# Altium PCB PCB_Project_TrafficLight.PcbDoc
Units mm, origin at the board's own origin, x right, y up, seen from the top; angles counter-clockwise.
Board outline 155.77 x 155.27 mm, 2 copper layers (Top Layer, Bottom Layer); 55 components, 146 nets, 516 pads, 0 vias.
Unrouted connection lines stored in the file: 247.
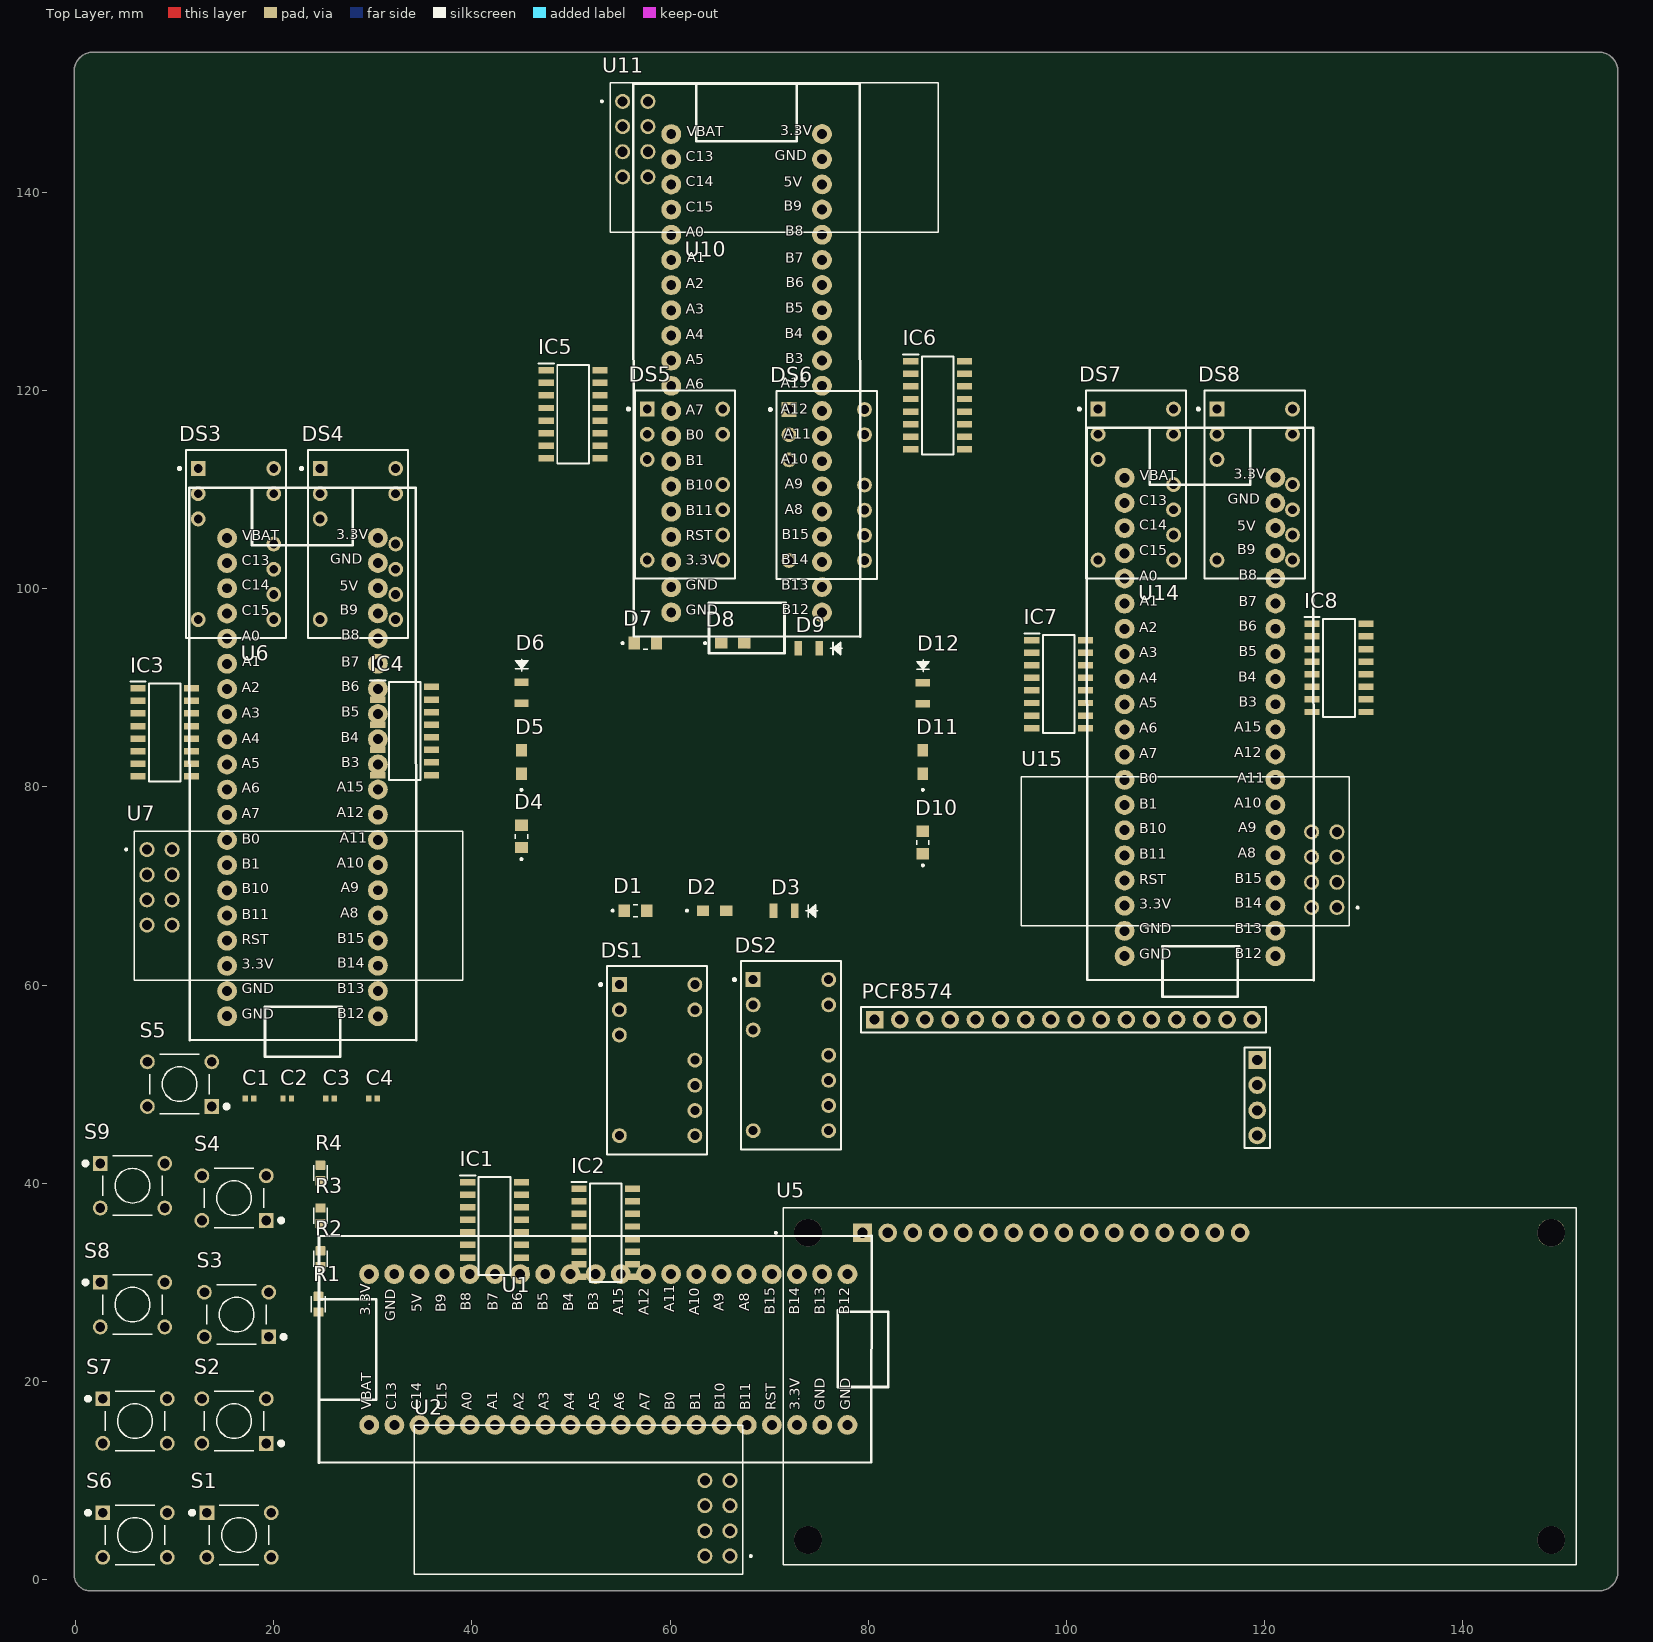
[diagram p0: Top Layer view]
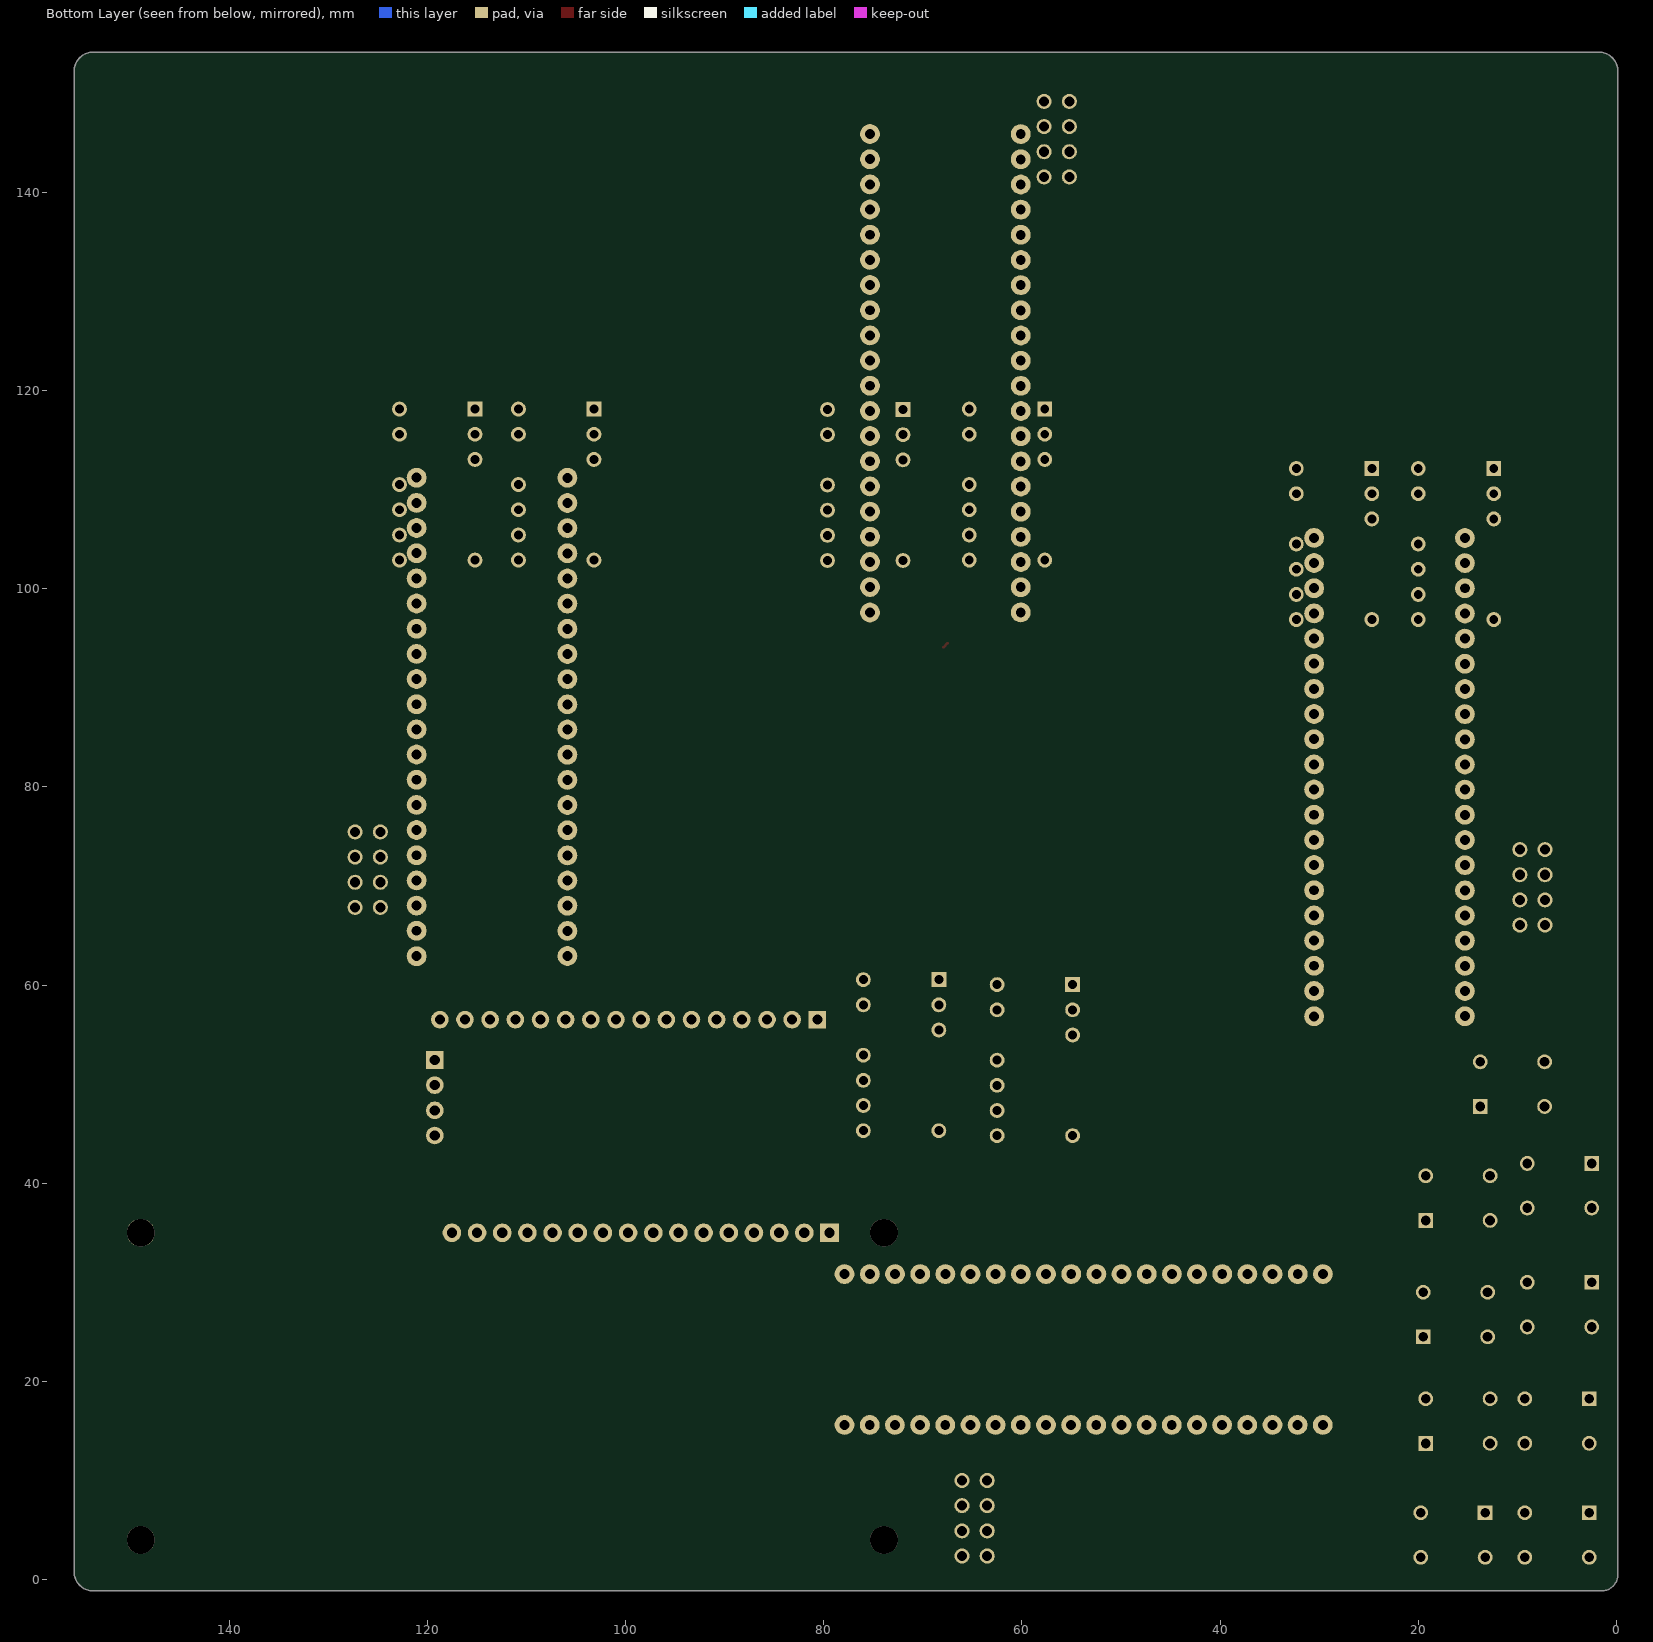
[diagram p1: Bottom Layer view, seen from below]

## Layer stack, top to bottom
Top Solder: solder mask 0.0102, Solder Resist, Dk 3.5
Top Layer: signal copper 0.0356
Dielectric 1: dielectric 0.32, FR-4, Dk 4.8
Bottom Layer: signal copper 0.0356
Bottom Solder: solder mask 0.0102, Solder Resist, Dk 3.5

## Board outline
0.344,-0.656 cw(c1.5,0.5) -0.135,0.5 -0.135,152.23 cw(c1.77,152.23) 1.77,154.135 153.73,154.135 cw(c153.73,152.23) 155.635,152.23 155.635,0.77 cw(c153.73,0.77) 153.73,-1.135 1.5,-1.135 cw(c1.5,0.5)

## Design rules (kind name [scope] priority, off if disabled: settings)
Clearance [All] p1: gap=0.254 ignorepadtopadclearanceinfootprint=FALSE
PolygonConnect [All] p1: connectstyle=Relief reliefconductorwidth=0.254 reliefentries=4 polygonreliefangle="90 Angle" airgapwidth=0.254
RoutingVias [All] p1: holewidth=0.711 width=1.27 viastyle="Through Hole" minholewidth=0.711 minwidth=1.27 maxholewidth=0.711 maxwidth=1.27
SolderMaskExpansion [All] p1: expansion=0.102 istentingtop=FALSE
SupplyNets "Schematic Supply Nets_2" [InNet('+5')] p1: voltage=0.000
SupplyNets "Schematic Supply Nets_1" [InNet('3.3VCC')] p2: voltage=0.000
SupplyNets "Schematic Supply Nets" [InNet('GND')] p3: voltage=0.000
Width [All] p1: maxlimit=0.5 minlimit=0.254 preferedwidth=0.3
30 further rules are at their usual default settings.

## Components (designator, comment, footprint, x,y, rotation, side; value= is the part's Value field where it differs from the comment)
C1 "10n" CAPC1005X55N 17.558,48.54 r0 top
C2 "10n" CAPC1005X55N 21.368,48.54 r0 top
C3 "10n" CAPC1005X55N 25.686,48.54 r0 top
C4 "10n" CAPC1005X55N 30.004,48.54 r0 top
D1 "7012X1" LED_7012X1 56.5,67.5 r0 top
D2 "APT2012YC" LED_APT2012YC 64.5,67.5 r0 top
D3 "CMD17-21VGD_TR8" LED_CMD17-21VGD_TR8 71.5,67.5 r180 top
D4 "7012X1" LED_7012X1 45,75 r90 top
D5 "APT2012YC" LED_APT2012YC 45,82.5 r90 top
D6 "CMD17-21VGD_TR8" LED_CMD17-21VGD_TR8 45,89.5 r270 top
D7 "7012X1" LED_7012X1 57.5,94.5 r0 top
D8 "APT2012YC" LED_APT2012YC 66.325,94.5 r0 top
D9 "CMD17-21VGD_TR8" LED_CMD17-21VGD_TR8 74,94 r180 top
D10 "7012X1" LED_7012X1 85.5,74.375 r90 top
D11 "APT2012YC" LED_APT2012YC 85.5,82.5 r90 top
D12 "CMD17-21VGD_TR8" LED_CMD17-21VGD_TR8 85.5,89.433 r270 top
DS1 "HDSP-311A" F-10(14) 58.69,52.42 r0 top
DS2 "HDSP-311A" F-10(14) 72.19,52.92 r0 top
DS3 "HDSP-311A" F-10(14) 16.19,104.5 r0 top
DS4 "HDSP-311A" F-10(14) 28.5,104.5 r0 top
DS5 "HDSP-311A" F-10(14) 61.5,110.5 r0 top
DS6 "HDSP-311A" F-10(14) 75.81,110.46 r0 top
DS7 "HDSP-311A" F-10(14) 107,110.5 r0 top
DS8 "HDSP-311A" F-10(14) 119,110.5 r0 top
IC1 "74HC595D" SOIC127P600X175-16N 42.288,35.675 r0 top
IC2 "74HC595D" SOIC127P600X175-16N 53.5,35 r0 top
IC3 "74HC595D" SOIC127P600X175-16N 9,85.5 r0 top
IC4 "74HC595D" SOIC127P600X175-16N 33.212,85.635 r0 top
IC5 "74HC595D" SOIC127P600X175-16N 50.212,117.595 r0 top
IC6 "74HC595D" SOIC127P600X175-16N 87,118.5 r0 top
IC7 "74HC595D" SOIC127P600X175-16N 99.212,90.365 r0 top
IC8 "74HC595D" SOIC127P600X175-16N 127.5,92 r0 top
PCF8574 "PCF8574" PCF8574 80.64,56.5 r0 top
R1 "10k" RESC1608X50N_CPF0603F10KC1 24.5,27.79 r90 top
R2 "10k" RESC1608X50N_CPF0603F10KC1 24.714,32.392 r90 top
R3 "10k" RESC1608X50N_CPF0603F10KC1 24.714,36.71 r90 top
R4 "10k" RESC1608X50N_CPF0603F10KC1 24.714,41.028 r90 top
S1 "FSM8JH" SW_FSM8JH 16.5,4.5 r0 top
S2 "FSM8JH" SW_FSM8JH 16,16 r180 top
S3 "FSM8JH" SW_FSM8JH 16.25,26.75 r180 top
S4 "FSM8JH" SW_FSM8JH 16,38.5 r180 top
S5 "FSM8JH" SW_FSM8JH 10.5,50 r180 top
S6 "FSM8JH" SW_FSM8JH 6,4.5 r0 top
S7 "FSM8JH" SW_FSM8JH 6,16 r0 top
S8 "FSM8JH" SW_FSM8JH 5.75,27.75 r0 top
S9 "FSM8JH" SW_FSM8JH 5.75,39.75 r0 top
U1 "STM32F103C8T6" "Stm32 BluePill" 48,23 r90 top
U2 "NRF24L01P-MODULE-PCB" XCVR_NRF24L01P-MODULE-PCB 50.755,8.049 r180 top
U5 "LCD-16X2" MODULE_LCD-16X2 111.42,19.5 r0 top
U6 "STM32F103C8T6" "Stm32 BluePill" 22.68,86.75 r0 top
U7 "NRF24L01P-MODULE-PCB" XCVR_NRF24L01P-MODULE-PCB 22.5,68 r0 top
U10 "STM32F103C8T6" "Stm32 BluePill" 67.5,127.5 r0 top
U11 "NRF24L01P-MODULE-PCB" XCVR_NRF24L01P-MODULE-PCB 70.5,143.5 r0 top
U14 "STM32F103C8T6" "Stm32 BluePill" 113.25,92.82 r0 top
U15 "NRF24L01P-MODULE-PCB" XCVR_NRF24L01P-MODULE-PCB 112,73.5 r180 top

## Footprints (in the part's own frame and the unit in brackets; to place one, negate y for a bottom-side part, rotate by r counter-clockwise, add the part's x,y. Pads: shape width x height; smd on the part's side, far side on the other; paste and mask are expansions set on the pad)
CAPC1005X55N [mm]
  rect 0.54x0.6 smd: 1(-0.432,0) 2(0.432,0)
  body extent -0.5,-0.25 0.5,0.25, height 0.55
F-10(14) [mm] "LED, 7-Segment Display, 10.16 mm, RHD; 14 Leads (4 Absent); Row Space 7.62 mm; Pitch 2.54 mm"
  rect 1.5x1.5 hole 0.9: 1(-3.81,7.62)
  round 1.5 hole 0.9: 2(-3.81,5.08) 3(-3.81,2.54) 7(-3.81,-7.62) 8(3.81,-7.62) 9(3.81,-5.08) 10(3.81,-2.54) 11(3.81,0) 13(3.81,5.08) 14(3.81,7.62)
  silkscreen extent -5.82,-9.5 5.05,9.5
LED_7012X1 [mm]
  rect 1.15x1.3 smd: A(1.125,0) C(-1.125,0)
  silkscreen extent -2.4,-0.63 0.23,0.63, body extent -0.62,-1 0.62,1, height 0.73
LED_APT2012YC [mm]
  rect 1.25x1.1 smd: 1(-1.175,0) 2(1.175,0)
  silkscreen extent -2.9,-0.1 -2.7,0.1
LED_CMD17-21VGD_TR8 [mil]
  rect 30x57 smd: 1(-42,0) 2(42,0)
  silkscreen extent -133,-24 -86,26, body extent -39,-25 39,25, height 47
MODULE_LCD-16X2 [mm]
  rect 1.88x1.88 / inner round 1.88 / far side rect 1.88x1.88 hole 1.016: 1(-32,15.5)
  round 1.88 hole 1.016: 2(-29.46,15.5) 3(-26.92,15.5) 4(-24.38,15.5) 5(-21.84,15.5) 6(-19.3,15.5) 7(-16.76,15.5) 8(-14.22,15.5) 9(-11.68,15.5) 10(-9.14,15.5) 11(-6.6,15.5) 12(-4.06,15.5) 13(-1.52,15.5) 14(1.02,15.5) 15(3.56,15.5) 16(6.1,15.5)
  round 2.8 hole 2.8 unplated: ""(-37.5,-15.5) ""(-37.5,15.5) ""(37.5,-15.5) ""(37.5,15.5)
  silkscreen extent -40.85,-18 40,18, body extent -40,-18 40,18, height 10.2
PCF8574 [mil]
  rect 70x70 hole 40: 1(0,0) 17(1520,-160)
  round 70 hole 40: 2(100,0) 3(200,0) 4(300,0) 5(400,0) 6(500,0) 7(600,0) 8(700,0) 9(800,0) 10(900,0) 11(1000,0) 12(1100,0) 13(1200,0) 14(1300,0) 15(1400,0) 16(1500,0) 18(1520,-260) 19(1520,-360) 20(1520,-460)
  silkscreen extent -55,-510 1570,50, body extent -62,-659 1572,50, height 330
RESC1608X50N_CPF0603F10KC1 [mm]
  rrect20% 0.94x1.02 smd: 1(-0.79,0) 2(0.79,0)
  silkscreen extent -0.8,-0.69 0.8,0.69, body extent -0.77,-0.4 0.77,0.4, height 0.55
SOIC127P600X175-16N [mm]
  rect 1.525x0.65 smd: 1(-2.712,4.445) 2(-2.712,3.175) 3(-2.712,1.905) 4(-2.712,0.635) 5(-2.712,-0.635) 6(-2.712,-1.905) 7(-2.712,-3.175) 8(-2.712,-4.445) 9(2.712,-4.445) 10(2.712,-3.175) 11(2.712,-1.905) 12(2.712,-0.635) 13(2.712,0.635) 14(2.712,1.905) 15(2.712,3.175) 16(2.712,4.445)
  silkscreen extent -3.47,-4.95 1.6,5.12, body extent -3,-4.95 3,4.95, height 1.75
"Stm32 BluePill" [mm]
  round 2 hole 1: 1(7.828,-29.909) 2(7.828,-27.343) 3(7.828,-24.803) 4(7.828,-22.263) 5(7.828,-19.723) 6(7.828,-17.183) 7(7.828,-14.643) 8(7.828,-12.103) 9(7.828,-9.563) 10(7.828,-7.023) 11(7.828,-4.483) 12(7.828,-1.943) 13(7.828,0.597) 14(7.828,3.137) 15(7.828,5.677) 16(7.828,8.217) 17(7.828,10.757) 18(7.828,13.297) 19(7.828,15.837) 20(7.828,18.377) 21(-7.386,18.366) 22(-7.386,15.826) 23(-7.386,13.286) 24(-7.386,10.746) 25(-7.386,8.206) 26(-7.386,5.666) 27(-7.386,3.126) 28(-7.386,0.586) 29(-7.386,-1.954) 30(-7.386,-4.494) 31(-7.386,-7.034) 32(-7.386,-9.574) 33(-7.386,-12.114) 34(-7.386,-14.654) 35(-7.386,-17.194) 36(-7.386,-19.734) 37(-7.386,-22.274) 38(-7.386,-24.814) 39(-7.386,-27.354) 40(-7.386,-29.894)
  silkscreen extent -11.22,-34 11.69,23.43, body extent -11.18,-33.27 11.68,24.29, height 12.31
SW_FSM8JH [mm]
  rect 1.498x1.498 / inner round 1.498 / far side rect 1.498x1.498 hole 0.99: 1(-3.25,2.25)
  round 1.498 hole 0.99: 2(-3.25,-2.25) 3(3.25,2.25) 4(3.25,-2.25)
  silkscreen extent -4.95,-3 3,3, body extent -3,-3.95 3,3.95, height 9.5
XCVR_NRF24L01P-MODULE-PCB [mil]
  round 60 hole 40: 1(-601.75,223.19) 2(-501.75,223.19) 3(-601.75,123.19) 4(-501.75,123.19) 5(-601.75,23.19) 6(-501.75,23.19) 7(-601.75,-76.81) 8(-501.75,-76.81)
  silkscreen extent -688,-297 652,297

## Part data
C1 C2 C3 C4: library part GCM155R11H103KA40D, "Multilayer Ceramic Capacitors MLCC - SMD/SMT", Package="1005 Taiyo Yuden", Check_prices=https://www.snapeda.com/parts/GCM155R11H103KA40D/Murata/view-part/?ref=eda, MF=Murata, MP=GCM155R11H103KA40D, SnapEDA_Link=https://www.snapeda.com/parts/GCM155R11H103KA40D/Murata/view-part/?ref=snap
D1 D4 D7 D10: "Red - LED Indication - Discrete 1.7V 0805 (2012 Metric)", Package="0805 Visual Communications", Availability="In Stock", Check_prices=https://www.snapeda.com/parts/7012X1/Visual+Communications/view-part/?ref=eda, MF=VCC, MP=7012X1, Price=None, Purchase-URL=https://pricing.snapeda.com/search/part/7012X1/?ref=eda, SnapEDA_Link=https://www.snapeda.com/parts/7012X1/Visual+Communications/view-part/?ref=snap
D2 D5 D8 D11: Package=None, Availability=Unavailable, MF="{'manufacturer': u'Kingbright'}", MP=APT2012YC, Price=None
D3 D6 D9 D12: "Green - LED Indication - Discrete 2.1V 0805 (2012 Metric)", Package="0805 Visual Communications", Check_prices=https://www.snapeda.com/parts/CMD17-21VGD/TR8/VCC/view-part/?ref=eda, MF=VCC, MP=CMD17-21VGD/TR8, SnapEDA_Link=https://www.snapeda.com/parts/CMD17-21VGD/TR8/VCC/view-part/?ref=snap
DS1 DS2 DS3 DS4 DS5 DS6 DS7 DS8: "10.16 mm Single Digit General Purpose AlGaAs Red 7-Segment Display: CA, RH DP", LED_Colour="AlGaAs Red", PackageDocument=20-Aug-2001, ComponentLink1Description="Manufacturer Link", ComponentLink1URL=http://www.agilent.com/, ComponentLink2Description=Datasheet, ComponentLink2URL=http://cp.literature.agilent.com/litweb/pdf/5988-2969EN.pdf, DatasheetDocument=20-Aug-2001, LatestRevisionDate=11-Oct-2004, LatestRevisionNote="Display outline superimposed on PCB Footprint.", LuminousIntensity="3200 ucd (Minimum).", Note="No pins are present in positions 4, 5, 6 and 12.", PackageReference=F-10(14), Published=26-May-2004, Publisher="Altium Limited"
IC1 IC2 IC3 IC4 IC5 IC6 IC7 IC8: "Shift Register Single 8-Bit Serial to Serial/Parallel 16-Pin SOIC T/R", Package="SOIC-16 ON Semiconductor", Check_prices=https://www.snapeda.com/parts/74HC595D/NXP+Semiconductors/view-part/?ref=eda, MF="NXP Semiconductors", MP=74HC595D, SnapEDA_Link=https://www.snapeda.com/parts/74HC595D/NXP+Semiconductors/view-part/?ref=snap
R1 R2 R3 R4: library part CPF0603F10KC1, "Res Thin Film 0603 10K Ohm 1% 1/16W Â±50ppm/Â°C Molded SMD SMD Paper T/R", Package=0603, Power_Rating=".063 W", Resistance=10K, Tolerance=1%, Voltage_Rating="50 V", Availability="In Stock", Check_prices=https://www.snapeda.com/parts/CPF0603F10KC1/TE+Connectivity+Passive+Product/view-part/?ref=eda, EU_RoHS_Compliance=Compliant, MF="TE Connectivity", MP=CPF0603F10KC1, Price=None, Purchase-URL=https://pricing.snapeda.com/search/part/CPF0603F10KC1/?ref=eda, SnapEDA_Link=https://www.snapeda.com/parts/CPF0603F10KC1/TE+Connectivity+Passive+Product/view-part/?ref=snap
S1 S2 S3 S4 S5 S6 S7 S8 S9: "Tactile Switch SPST-NO Top Actuated Through Hole", Package=None, Availability="In Stock", Check_prices=https://www.snapeda.com/parts/FSM8JH/TE+Connectivity+ALCOSWITCH+Switches/view-part/?ref=eda, MF="TE Connectivity", MP=FSM8JH, Price=None, SnapEDA_Link=https://www.snapeda.com/parts/FSM8JH/TE+Connectivity+ALCOSWITCH+Switches/view-part/?ref=snap
U1 U6 U10 U14: library part BluePill, "Designed By @Alixahedi"
U2 U7 U11 U15: "- Transceiver For Use With nRF24L01+", Package=None, Availability=Bad, MF="Nordic Semiconductor", Mouser-Purchase-URL=https://snapeda.com/shop?store=Mouser&id=230534, MP=NRF24L01P-MODULE-PCB, Price=None, SnapEDA_Link=https://www.snapeda.com/parts/NRF24L01P-MODULE-PCB/Nordic%20Semiconductor%20ASA/view-part/230534/?ref=snap
U5: "Display Development Tools 16x2 Black on Green Char LCD w Backlight", Package=None, Check_prices=https://www.snapeda.com/parts/LCD-16X2/Gravitech/view-part/?ref=eda, MF=Gravitech, MP=LCD-16X2, SnapEDA_Link=https://www.snapeda.com/parts/LCD-16X2/Gravitech/view-part/?ref=snap

## Nets (pads, with @x,y where several pads share a name; then routed paths per layer and width w, separated by ;. In a path a pad name is that pad's centre, name@x,y a point inside that pad or via, vN(x,y) a via of type N, cw(c..) or ccw(c..) an arc to the next point about the centre after c; other vN are vias at no path point)
3.3VCC: R1.2 R2.2 R3.2 R4.2 U2.2 U7.2 U11.2 U15.2
+5: DS1.3 DS1.14 DS2.3 DS2.14 DS3.3 DS3.14 DS4.3 DS4.14 DS5.3 DS5.14 DS6.3 DS6.14 DS7.3 DS7.14 DS8.3 DS8.14 IC1.16 IC2.16 IC3.16 IC4.16 IC5.16 IC6.16 IC7.16 IC8.16 PCF8574.19 U1.18 U6.18 U10.18 U14.18
GND: C1.1 C2.1 C3.1 C4.1 D1.C D2.1 D3.2 D4.C D5.1 D6.2 D7.C D8.1 D9.2 D10.C D11.1 D12.2 IC1.8 IC1.13 IC2.8 IC2.13 IC3.8 IC3.13 IC4.8 IC4.13 IC5.8 IC5.13 IC6.8 IC6.13 IC7.8 IC7.13 IC8.8 IC8.13 PCF8574.20 S1.3 S2.3 S3.3 S4.3 S5.3 S6.3 S7.3 S8.3 S9.3 U1.39 U1.40 U2.1 U6.39 U6.40 U7.1 U10.39 U10.40 U11.1 U14.39 U14.40 U15.1
NetD1_A: D1.A U1.7
NetD2_2: D2.2 U1.6
NetD3_1: D3.1 U1.5
NetD4_A: D4.A U6.7
NetD5_2: D5.2 U6.6
NetD6_1: D6.1 U6.5
NetD7_A: D7.A U10.7
NetD8_2: D8.2 U10.6 | length 0.6
  Top Layer w0.254: D8.2 D8.2@67.923,94.077
NetD9_1: D9.1 U10.5
NetD10_A: D10.A U14.7
NetD11_2: D11.2 U14.6
NetD12_1: D12.1 U14.5
NetDS1_1: DS1.1 IC1.15
NetDS1_2: DS1.2 IC1.5
NetDS1_7: DS1.7 IC1.4
NetDS1_8: DS1.8 IC1.3
NetDS1_9: DS1.9 IC1.7
NetDS1_10: DS1.10 IC1.2
NetDS1_11: DS1.11 IC1.6
NetDS1_13: DS1.13 IC1.1
NetDS2_1: DS2.1 IC2.15
NetDS2_2: DS2.2 IC2.5
NetDS2_7: DS2.7 IC2.4
NetDS2_8: DS2.8 IC2.3
NetDS2_9: DS2.9 IC2.7
NetDS2_10: DS2.10 IC2.2
NetDS2_11: DS2.11 IC2.6
NetDS2_13: DS2.13 IC2.1
NetDS3_1: DS3.1 IC3.15
NetDS3_2: DS3.2 IC3.5
NetDS3_7: DS3.7 IC3.4
NetDS3_8: DS3.8 IC3.3
NetDS3_9: DS3.9 IC3.7
NetDS3_10: DS3.10 IC3.2
NetDS3_11: DS3.11 IC3.6
NetDS3_13: DS3.13 IC3.1
NetDS4_1: DS4.1 IC4.15
NetDS4_2: DS4.2 IC4.5
NetDS4_7: DS4.7 IC4.4
NetDS4_8: DS4.8 IC4.3
NetDS4_9: DS4.9 IC4.7
NetDS4_10: DS4.10 IC4.2
NetDS4_11: DS4.11 IC4.6
NetDS4_13: DS4.13 IC4.1
NetDS5_1: DS5.1 IC5.15
NetDS5_2: DS5.2 IC5.5
NetDS5_7: DS5.7 IC5.4
NetDS5_8: DS5.8 IC5.3
NetDS5_9: DS5.9 IC5.7
NetDS5_10: DS5.10 IC5.2
NetDS5_11: DS5.11 IC5.6
NetDS5_13: DS5.13 IC5.1
NetDS6_1: DS6.1 IC6.15
NetDS6_2: DS6.2 IC6.5
NetDS6_7: DS6.7 IC6.4
NetDS6_8: DS6.8 IC6.3
NetDS6_9: DS6.9 IC6.7
NetDS6_10: DS6.10 IC6.2
NetDS6_11: DS6.11 IC6.6
NetDS6_13: DS6.13 IC6.1
NetDS7_1: DS7.1 IC7.15
NetDS7_2: DS7.2 IC7.5
NetDS7_7: DS7.7 IC7.4
NetDS7_8: DS7.8 IC7.3
NetDS7_9: DS7.9 IC7.7
NetDS7_10: DS7.10 IC7.2
NetDS7_11: DS7.11 IC7.6
NetDS7_13: DS7.13 IC7.1
NetDS8_1: DS8.1 IC8.15
NetDS8_2: DS8.2 IC8.5
NetDS8_7: DS8.7 IC8.4
NetDS8_8: DS8.8 IC8.3
NetDS8_9: DS8.9 IC8.7
NetDS8_10: DS8.10 IC8.2
NetDS8_11: DS8.11 IC8.6
NetDS8_13: DS8.13 IC8.1
NetIC1_9: IC1.9 IC2.14
NetIC1_11: IC1.11 IC2.11 U1.2
NetIC1_12: IC1.12 IC2.12 U1.1
NetIC1_14: IC1.14 U1.4
NetIC3_9: IC3.9 IC4.14
NetIC3_11: IC3.11 IC4.11 U6.2
NetIC3_12: IC3.12 IC4.12 U6.1
NetIC3_14: IC3.14 U6.4
NetIC5_9: IC5.9 IC6.14
NetIC5_11: IC5.11 IC6.11 U10.2
NetIC5_12: IC5.12 IC6.12 U10.1
NetIC5_14: IC5.14 U10.4
NetIC7_9: IC7.9 IC8.14
NetIC7_11: IC7.11 IC8.11 U14.2
NetIC7_12: IC7.12 IC8.12 U14.1
NetIC7_14: IC7.14 U14.4
NetPCF8574_1: PCF8574.1 U5.1
NetPCF8574_2: PCF8574.2 U5.2
NetPCF8574_3: PCF8574.3 U5.3
NetPCF8574_4: PCF8574.4 U5.4
NetPCF8574_5: PCF8574.5 U5.5
NetPCF8574_6: PCF8574.6 U5.6
NetPCF8574_7: PCF8574.7 U5.7
NetPCF8574_8: PCF8574.8 U5.8
NetPCF8574_9: PCF8574.9 U5.9
NetPCF8574_10: PCF8574.10 U5.10
NetPCF8574_11: PCF8574.11 U5.11
NetPCF8574_12: PCF8574.12 U5.12
NetPCF8574_13: PCF8574.13 U5.13
NetPCF8574_14: PCF8574.14 U5.14
NetPCF8574_15: PCF8574.15 U5.15
NetPCF8574_16: PCF8574.16 U5.16
NetPCF8574_17: PCF8574.17 U1.35
NetPCF8574_18: PCF8574.18 U1.36
NetS1_1: S1.1 U1.13
NetS2_1: S2.1 U1.14
NetS3_1: S3.1 U1.15
NetS4_1: S4.1 U1.16
NetS5_1: S5.1 U1.17
NetU1_25: U1.25 U2.8
NetU1_28: U1.28 U2.3
NetU1_29: U1.29 U2.4
NetU1_30: U1.30 U2.5
NetU1_31: U1.31 U2.7
NetU1_32: U1.32 U2.6
NetU6_25: U6.25 U7.8
NetU6_28: U6.28 U7.3
NetU6_29: U6.29 U7.4
NetU6_30: U6.30 U7.5
NetU6_31: U6.31 U7.7
NetU6_32: U6.32 U7.6
NetU10_25: U10.25 U11.8
NetU10_28: U10.28 U11.3
NetU10_29: U10.29 U11.4
NetU10_30: U10.30 U11.5
NetU10_31: U10.31 U11.7
NetU10_32: U10.32 U11.6
NetU14_25: U14.25 U15.8
NetU14_28: U14.28 U15.3
NetU14_29: U14.29 U15.4
NetU14_30: U14.30 U15.5
NetU14_31: U14.31 U15.7
NetU14_32: U14.32 U15.6
RESETU1: C1.2 R1.1 S6.1 U1.37
RESETU6: C2.2 R2.1 S7.1 U6.37
RESETU10: C3.2 R3.1 S8.1 U10.37
RESETU14: C4.2 R4.1 S9.1 U14.37
pads on no net: IC1.10 IC2.9 IC2.10 IC3.10 IC4.9 IC4.10 IC5.10 IC6.9 IC6.10 IC7.10 IC8.9 IC8.10 S1.2 S1.4 S2.2 S2.4 S3.2 S3.4 S4.2 S4.4 S5.2 S5.4 S6.2 S6.4 S7.2 S7.4 S8.2 S8.4 S9.2 S9.4 U1.3 U1.8 U1.9 U1.10 U1.11 U1.12 U1.19 U1.20 U1.21 U1.22 U1.23 U1.24 U1.26 U1.27 U1.33 U1.34 U1.38 U5. U6.3 U6.8 U6.9 U6.10 U6.11 U6.12 U6.13 U6.14 U6.15 U6.16 U6.17 U6.19 U6.20 U6.21 U6.22 U6.23 U6.24 U6.26 U6.27 U6.33 U6.34 U6.35 U6.36 U6.38 U10.3 U10.8 U10.9 U10.10 U10.11 U10.12 U10.13 U10.14 U10.15 U10.16 U10.17 U10.19 U10.20 U10.21 U10.22 U10.23 U10.24 U10.26 U10.27 U10.33 U10.34 U10.35 U10.36 U10.38 U14.3 U14.8 U14.9 U14.10 U14.11 U14.12 U14.13 U14.14 U14.15 U14.16 U14.17 U14.19 U14.20 U14.21 U14.22 U14.23 U14.24 U14.26 U14.27 U14.33 U14.34 U14.35 U14.36 U14.38

## Silkscreen, mask and mechanical layers (free items; w line width, h text height)
Mechanical 15:
  lines w1.27: 0.5,0.5 ccw(c1.5,0.5) 1.5,-0.5 ; 0.5,0.5 ccw(c1.5,0.5) 1.5,-0.5 ; 0.5,0.5 0.5,152.23 cw(c1.77,152.23) 1.77,153.5 153.73,153.5 cw(c153.73,152.23) 155,152.23 155,0.77 cw(c153.73,0.77) 153.73,-0.5 1.5,-0.5

## Text inside footprints (layer, text, board x,y; h text height)
U1: Top Overlay "5V" at 35.306,26.993 h1.78 r90; Top Overlay "B9" at 37.719,26.993 h1.78 r90; Top Overlay "B8" at 40.259,27.12 h1.78 r90; Top Overlay "3.3V" at 30.099,26.612 h1.78 r90; Top Overlay "GND" at 32.613,26.048 h1.78 r90; Top Overlay "A5" at 53.213,17.087 h1.78 r90; Top Overlay "A2" at 45.562,17.087 h1.78 r90; Top Overlay "A3" at 48.107,17.087 h1.78 r90; Top Overlay "A4" at 50.692,17.087 h1.78 r90; Top Overlay "RST" at 70.993,17.087 h1.78 r90; Top Overlay "B10" at 65.862,17.087 h1.78 r90; Top Overlay "B11" at 68.447,17.087 h1.78 r90; Top Overlay "A6" at 55.702,17.087 h1.78 r90; Top Overlay "A7" at 58.287,17.087 h1.78 r90; Top Overlay "B0" at 60.833,17.087 h1.78 r90; Top Overlay "B1" at 63.392,17.087 h1.78 r90; Top Overlay "3.3V" at 73.456,17.087 h1.78 r90; Top Overlay "B15" at 70.891,26.749 h1.78 r90; Top Overlay "A8" at 68.326,27.056 h1.78 r90; Top Overlay "A11" at 60.751,26.973 h1.78 r90; Top Overlay "B3" at 53.111,27.12 h1.78 r90; Top Overlay "A9" at 65.76,27.087 h1.78 r90; Top Overlay "A15" at 55.6,26.686 h1.78 r90; Top Overlay "A12" at 58.185,26.686 h1.78 r90; Top Overlay "A10" at 63.271,26.686 h1.78 r90; Top Overlay "VBAT" at 30.22,17.16 h1.78 r90; Top Overlay "B5" at 48.006,27.12 h1.78 r90; Top Overlay "B14" at 73.375,26.719 h1.78 r90; Top Overlay "B7" at 42.971,27.12 h1.78 r90; Top Overlay "B4" at 50.591,27.087 h1.78 r90; Top Overlay "B6" at 45.44,27.15 h1.78 r90; Top Overlay "C15" at 37.795,17.087 h1.78 r90; Top Overlay "C13" at 32.74,17.087 h1.78 r90; Top Overlay "C14" at 35.229,17.087 h1.78 r90; Top Overlay "A0" at 40.36,17.087 h1.78 r90; Top Overlay "A1" at 42.92,17.158 h1.78 r90; Top Overlay "GND" at 75.946,17.087 h1.78 r90; Top Overlay "B13" at 75.946,26.739 h1.78 r90; Top Overlay "GND" at 78.511,17.087 h1.78 r90; Top Overlay "B12" at 78.455,26.749 h1.78 r90
U6: Top Overlay "5V" at 26.673,99.444 h1.78; Top Overlay "B9" at 26.673,97.031 h1.78; Top Overlay "B8" at 26.8,94.491 h1.78; Top Overlay "3.3V" at 26.292,104.651 h1.78; Top Overlay "GND" at 25.728,102.137 h1.78; Top Overlay "A5" at 16.767,81.537 h1.78; Top Overlay "A2" at 16.767,89.188 h1.78; Top Overlay "A3" at 16.767,86.643 h1.78; Top Overlay "A4" at 16.767,84.058 h1.78; Top Overlay "RST" at 16.767,63.757 h1.78; Top Overlay "B10" at 16.767,68.888 h1.78; Top Overlay "B11" at 16.767,66.303 h1.78; Top Overlay "A6" at 16.767,79.048 h1.78; Top Overlay "A7" at 16.767,76.463 h1.78; Top Overlay "B0" at 16.767,73.917 h1.78; Top Overlay "B1" at 16.767,71.358 h1.78; Top Overlay "3.3V" at 16.767,61.294 h1.78; Top Overlay "B15" at 26.429,63.859 h1.78; Top Overlay "A8" at 26.736,66.424 h1.78; Top Overlay "A11" at 26.653,73.999 h1.78; Top Overlay "B3" at 26.8,81.639 h1.78; Top Overlay "A9" at 26.767,68.99 h1.78; Top Overlay "A15" at 26.366,79.15 h1.78; Top Overlay "A12" at 26.366,76.565 h1.78; Top Overlay "A10" at 26.366,71.479 h1.78; Top Overlay "VBAT" at 16.84,104.53 h1.78; Top Overlay "B5" at 26.8,86.744 h1.78; Top Overlay "B14" at 26.399,61.375 h1.78; Top Overlay "B7" at 26.8,91.779 h1.78; Top Overlay "B4" at 26.767,84.159 h1.78; Top Overlay "B6" at 26.83,89.31 h1.78; Top Overlay "C15" at 16.767,96.955 h1.78; Top Overlay "C13" at 16.767,102.01 h1.78; Top Overlay "C14" at 16.767,99.521 h1.78; Top Overlay "A0" at 16.767,94.39 h1.78; Top Overlay "A1" at 16.838,91.83 h1.78; Top Overlay "GND" at 16.767,58.804 h1.78; Top Overlay "B13" at 26.419,58.804 h1.78; Top Overlay "GND" at 16.767,56.239 h1.78; Top Overlay "B12" at 26.429,56.295 h1.78
U10: Top Overlay "5V" at 71.493,140.194 h1.78; Top Overlay "B9" at 71.493,137.781 h1.78; Top Overlay "B8" at 71.62,135.241 h1.78; Top Overlay "3.3V" at 71.112,145.401 h1.78; Top Overlay "GND" at 70.548,142.887 h1.78; Top Overlay "A5" at 61.587,122.287 h1.78; Top Overlay "A2" at 61.587,129.938 h1.78; Top Overlay "A3" at 61.587,127.393 h1.78; Top Overlay "A4" at 61.587,124.808 h1.78; Top Overlay "RST" at 61.587,104.507 h1.78; Top Overlay "B10" at 61.587,109.638 h1.78; Top Overlay "B11" at 61.587,107.053 h1.78; Top Overlay "A6" at 61.587,119.798 h1.78; Top Overlay "A7" at 61.587,117.213 h1.78; Top Overlay "B0" at 61.587,114.667 h1.78; Top Overlay "B1" at 61.587,112.108 h1.78; Top Overlay "3.3V" at 61.587,102.044 h1.78; Top Overlay "B15" at 71.249,104.609 h1.78; Top Overlay "A8" at 71.556,107.174 h1.78; Top Overlay "A11" at 71.473,114.749 h1.78; Top Overlay "B3" at 71.62,122.389 h1.78; Top Overlay "A9" at 71.587,109.74 h1.78; Top Overlay "A15" at 71.186,119.9 h1.78; Top Overlay "A12" at 71.186,117.315 h1.78; Top Overlay "A10" at 71.186,112.229 h1.78; Top Overlay "VBAT" at 61.66,145.28 h1.78; Top Overlay "B5" at 71.62,127.494 h1.78; Top Overlay "B14" at 71.219,102.125 h1.78; Top Overlay "B7" at 71.62,132.529 h1.78; Top Overlay "B4" at 71.587,124.909 h1.78; Top Overlay "B6" at 71.65,130.06 h1.78; Top Overlay "C15" at 61.587,137.705 h1.78; Top Overlay "C13" at 61.587,142.76 h1.78; Top Overlay "C14" at 61.587,140.271 h1.78; Top Overlay "A0" at 61.587,135.14 h1.78; Top Overlay "A1" at 61.658,132.58 h1.78; Top Overlay "GND" at 61.587,99.554 h1.78; Top Overlay "B13" at 71.239,99.554 h1.78; Top Overlay "GND" at 61.587,96.989 h1.78; Top Overlay "B12" at 71.249,97.045 h1.78
U14: Top Overlay "5V" at 117.243,105.514 h1.78; Top Overlay "B9" at 117.243,103.101 h1.78; Top Overlay "B8" at 117.37,100.561 h1.78; Top Overlay "3.3V" at 116.862,110.721 h1.78; Top Overlay "GND" at 116.298,108.207 h1.78; Top Overlay "A5" at 107.337,87.607 h1.78; Top Overlay "A2" at 107.337,95.258 h1.78; Top Overlay "A3" at 107.337,92.713 h1.78; Top Overlay "A4" at 107.337,90.128 h1.78; Top Overlay "RST" at 107.337,69.827 h1.78; Top Overlay "B10" at 107.337,74.958 h1.78; Top Overlay "B11" at 107.337,72.373 h1.78; Top Overlay "A6" at 107.337,85.118 h1.78; Top Overlay "A7" at 107.337,82.533 h1.78; Top Overlay "B0" at 107.337,79.987 h1.78; Top Overlay "B1" at 107.337,77.428 h1.78; Top Overlay "3.3V" at 107.337,67.364 h1.78; Top Overlay "B15" at 116.999,69.929 h1.78; Top Overlay "A8" at 117.306,72.494 h1.78; Top Overlay "A11" at 117.223,80.069 h1.78; Top Overlay "B3" at 117.37,87.709 h1.78; Top Overlay "A9" at 117.337,75.06 h1.78; Top Overlay "A15" at 116.936,85.22 h1.78; Top Overlay "A12" at 116.936,82.635 h1.78; Top Overlay "A10" at 116.936,77.549 h1.78; Top Overlay "VBAT" at 107.41,110.6 h1.78; Top Overlay "B5" at 117.37,92.814 h1.78; Top Overlay "B14" at 116.969,67.445 h1.78; Top Overlay "B7" at 117.37,97.849 h1.78; Top Overlay "B4" at 117.337,90.229 h1.78; Top Overlay "B6" at 117.4,95.38 h1.78; Top Overlay "C15" at 107.337,103.025 h1.78; Top Overlay "C13" at 107.337,108.08 h1.78; Top Overlay "C14" at 107.337,105.591 h1.78; Top Overlay "A0" at 107.337,100.46 h1.78; Top Overlay "A1" at 107.408,97.9 h1.78; Top Overlay "GND" at 107.337,64.874 h1.78; Top Overlay "B13" at 116.989,64.874 h1.78; Top Overlay "GND" at 107.337,62.309 h1.78; Top Overlay "B12" at 116.999,62.365 h1.78